# Altium PCB PCB1.pcbdoc
Units mil, origin at the board's own origin, x right, y up, seen from the top; angles counter-clockwise.
Board outline 3330.35 x 2468.5 mil, 2 copper layers (Top Layer, Bottom Layer); 66 components, 77 nets, 279 pads, 115 vias.
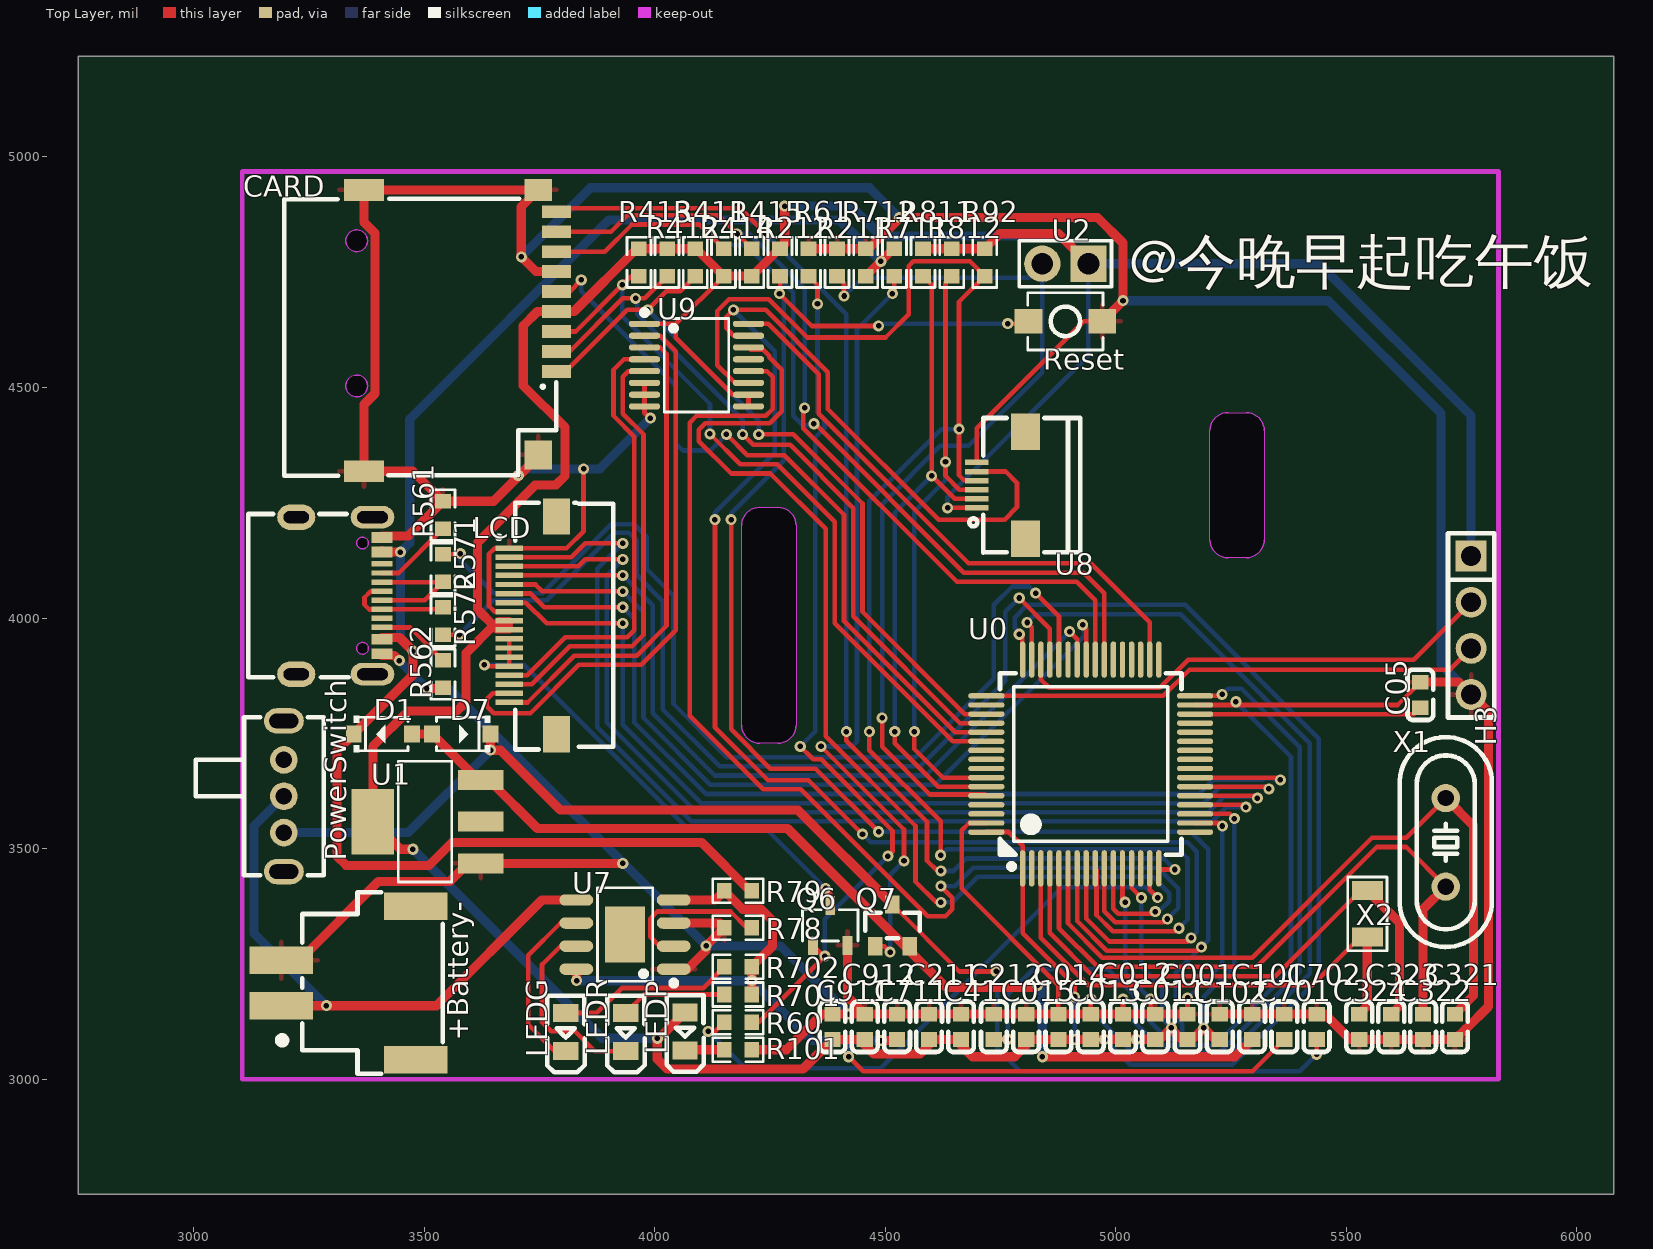
[diagram p0: Top Layer view]
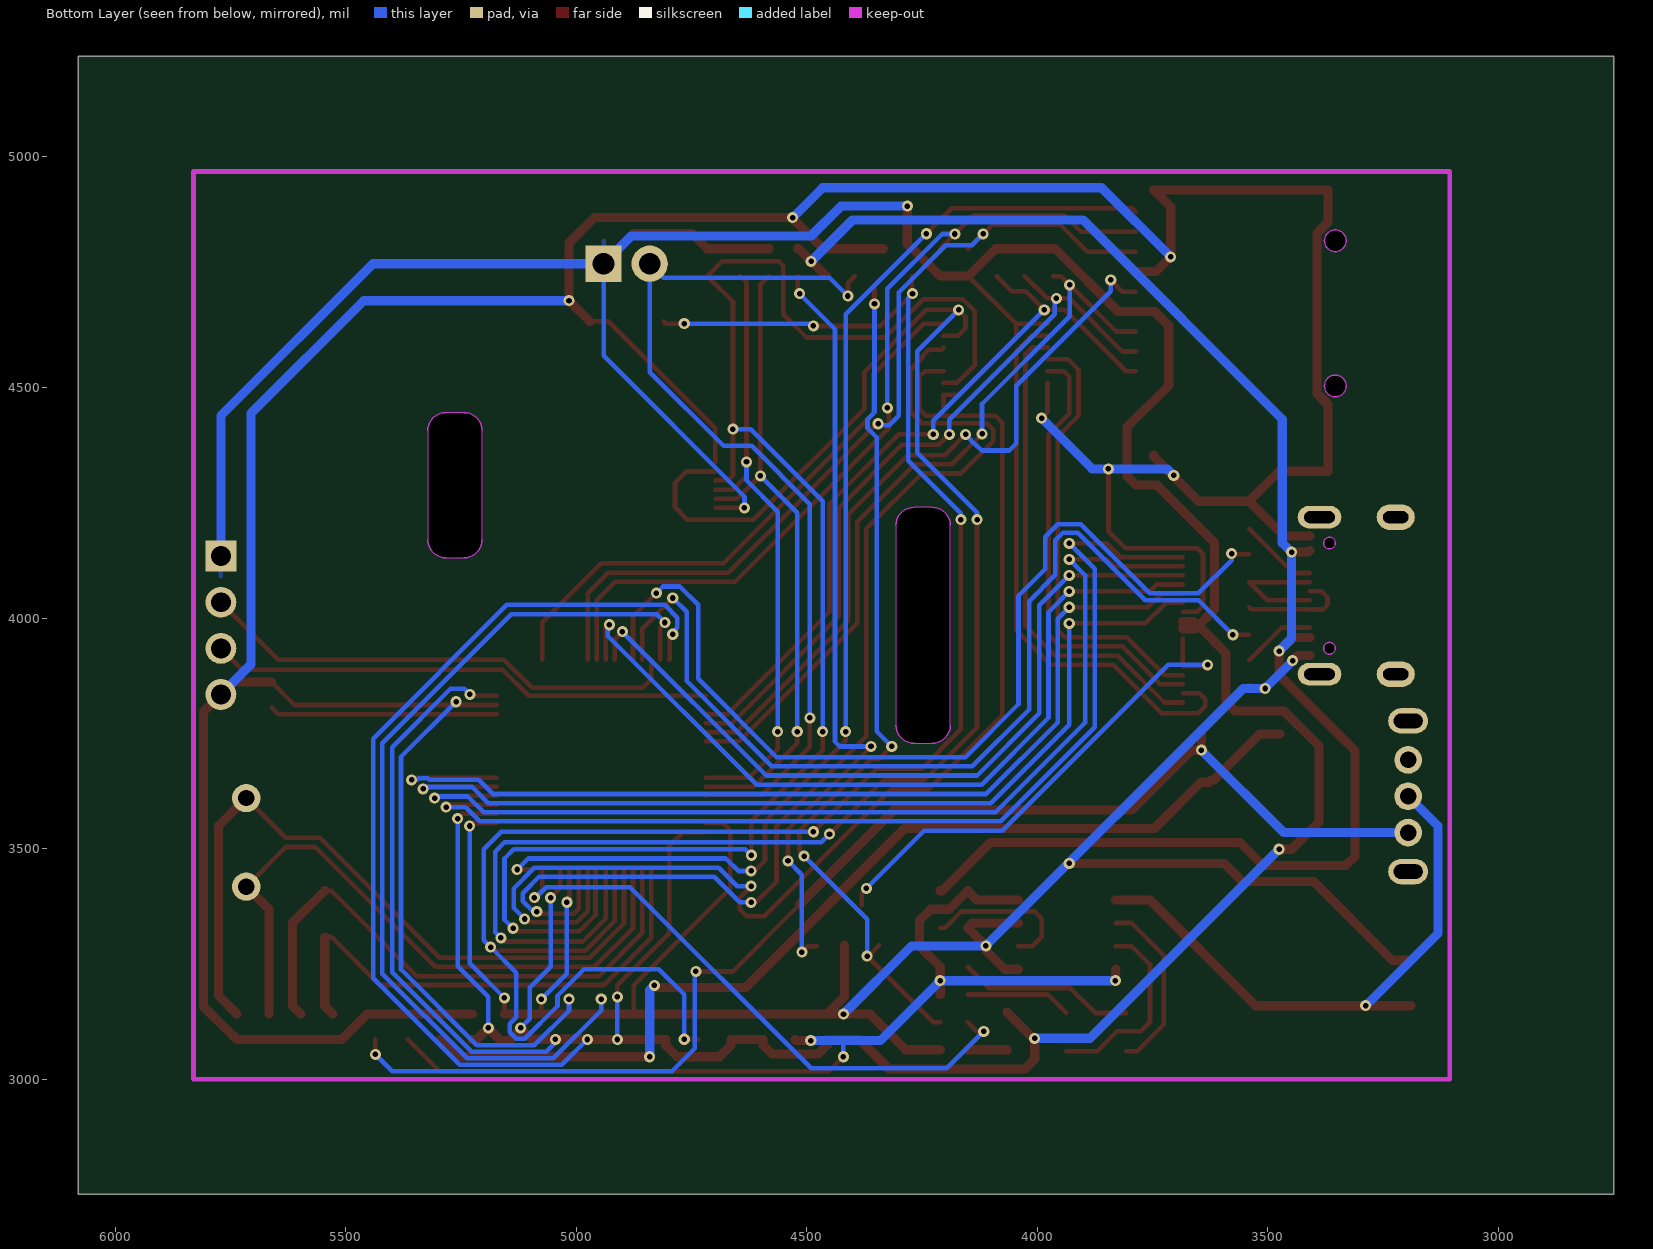
[diagram p1: Bottom Layer view, seen from below]

## Layer stack, top to bottom
Top Layer: signal copper (thickness not stored)
Dielectric: dielectric 12.6, FR-4, Dk 4.8
Bottom Layer: signal copper (thickness not stored)

## Board outline
6080.35,2750 2750,2750 2750,5218.5 6080.35,5218.5
cut-out: 4227.99,4240.16 4267.36,4240.16 cw(c4267.36,4200.79) 4306.73,4200.79 4306.73,3767.72 cw(c4267.36,3767.72) 4267.36,3728.35 4227.99,3728.35 cw(c4227.99,3767.72) 4188.62,3767.72 4188.62,4200.79 cw(c4227.99,4200.79)
cut-out: 5243.74,4445.67 5283.11,4445.67 cw(c5283.11,4406.3) 5322.48,4406.3 5322.48,4170.08 cw(c5283.11,4170.08) 5283.11,4130.71 5243.74,4130.71 cw(c5243.74,4170.08) 5204.37,4170.08 5204.37,4406.3 cw(c5243.74,4406.3)

## Design rules (kind name [scope] priority, off if disabled: settings)
BoardOutlineClearance copperThickness1oz [All] p0: genericclearance=10 ignorepadtopadclearanceinfootprint=FALSE except(0: Arc-SplitContinuation Track-SplitContinuation SMDPad-SplitContinuation THPad-SplitContinuation Via-SplitContinuation Fill-SplitContinuation Poly-SplitContinuation Region-SplitContinuation Text-SplitContinuation; 6: Track-CutoutEdge SMDPad-CutoutEdge THPad-CutoutEdge Via-CutoutEdge Region-CutoutEdge; 11.8: Track-OutlineEdge SMDPad-OutlineEdge THPad-OutlineEdge Via-OutlineEdge Fill-OutlineEdge Region-OutlineEdge Poly-OutlineEdge Text-OutlineEdge Fill-CutoutEdge)
BoardOutlineClearance copperThickness2oz [All] p0: genericclearance=10 ignorepadtopadclearanceinfootprint=FALSE except(0: Arc-SplitContinuation Track-SplitContinuation SMDPad-SplitContinuation THPad-SplitContinuation Via-SplitContinuation Fill-SplitContinuation Poly-SplitContinuation Region-SplitContinuation Text-SplitContinuation; 6: Track-CutoutEdge SMDPad-CutoutEdge THPad-CutoutEdge Via-CutoutEdge Region-CutoutEdge; 11.8: Track-OutlineEdge SMDPad-OutlineEdge THPad-OutlineEdge Via-OutlineEdge Fill-OutlineEdge Region-OutlineEdge Poly-OutlineEdge Text-OutlineEdge Fill-CutoutEdge)
Clearance copperThickness1oz [(InNet('GND') OR InNet('VBAT') OR InNet('$1N3572') OR InNet('$1N3568') OR InNet('VCC3V3') OR InNet('VOUT') OR InNet('SWCLK') OR InNet('SWIO') OR InNet('VBUS') OR InNet('$1N3577') OR InNet('$1N3580') OR InNet('$1N3578') OR InNet('$1N3579') OR InNet('$1N3566') OR InNet('$1N3569') OR InNet('BOOT0') OR InNet('OSCIN') OR InNet('OSCOUT') OR InNet('RESET') OR InNet('YU/Y-') OR InNet('XL/X-') OR InNet('K') OR InNet('XR/X+') OR InNet('YD/Y+') OR InNet('LED') OR InNet('$1N8049') OR InNet('$1N21734') OR InNet('OSC32IN') OR InNet('OSC32OUT') OR InNet('SDIO_D1') OR InNet('SDIO_D0') OR InNet('SDIO_CLK') OR InNet('SDIO_CMD') OR InNet('SDIO_D3') OR InNet('SDIO_D2') OR InNet('TF_CD') OR InNet('TP_IRQ') OR InNet('SPI2_MOSI') OR InNet('SPI2_SCK') OR InNet('SPI1_MISO') OR InNet('SPI1_MOSI') OR InNet('SPI1_CS') OR InNet('SPI1_DC') OR InNet('SPI1_SCK') OR InNet('SPI1_RESET') OR InNet('TP_CS') OR InNet('$1N32516') OR InNet('USB_OTG_FS_DM') OR InNet('USB_OTG_FS_DP') OR InNet('$1N32510') OR InNet('$1N30328') OR InNet('$1N30333') OR InNet('$1N30321') OR InNet('$1N30324') OR InNet('$1N30323') OR InNet('$1N30263') OR InNet('USB_OTG_FS_ID') OR InNet('$1N30287') OR InNet('$1N30381') OR InNet('$1N30347') OR InNet('$1N30352') OR InNet('$1N30355') OR InNet('$1N30360') OR InNet('$1N30357') OR InNet('$1N30378') OR InNet('$1N30326') OR InNet('$1N30300') OR InNet('$1N30298') OR InNet('$1N30240') OR InNet('$1N28494') OR InNet('SPI2_MISO') OR InNet('$1N30291') OR InNet('C_TP_SDA') OR InNet('C_TP_SCK') OR InNet('$1N35567') OR InNet('$1N32508') OR InNet('$1N30354'))] p1: gap=7 ignorepadtopadclearanceinfootprint=FALSE except(4: Track-Track; 6: Track-SMDPad SMDPad-SMDPad Track-THPad SMDPad-THPad THPad-THPad Track-Via SMDPad-Via THPad-Via Via-Via SMDPad-Fill THPad-Fill Via-Fill Fill-Fill Track-Region SMDPad-Region THPad-Region Via-Region Region-Region Track-Poly SMDPad-Poly THPad-Poly Via-Poly Fill-Poly Region-Poly Poly-Poly Track-Text SMDPad-Text THPad-Text Via-Text Fill-Text Region-Text Poly-Text Text-Text; 6.9: Track-Hole SMDPad-Hole THPad-Hole Via-Hole Fill-Hole Region-Hole Poly-Hole Text-Hole Sheet-Hole; 11.8: Track-Fill Fill-Region Track-Sheet SMDPad-Sheet THPad-Sheet Via-Sheet Fill-Sheet Region-Sheet Poly-Sheet Text-Sheet)
Clearance copperThickness2oz [All] p1: gap=7 ignorepadtopadclearanceinfootprint=FALSE except(6: Track-SMDPad SMDPad-SMDPad Track-THPad SMDPad-THPad THPad-THPad Track-Via SMDPad-Via THPad-Via Via-Via SMDPad-Fill THPad-Fill Via-Fill Fill-Fill Track-Region SMDPad-Region THPad-Region Via-Region Region-Region Track-Poly SMDPad-Poly THPad-Poly Via-Poly Fill-Poly Region-Poly Poly-Poly Track-Text SMDPad-Text THPad-Text Via-Text Fill-Text Region-Text Poly-Text Text-Text; 6.9: Track-Hole SMDPad-Hole THPad-Hole Via-Hole Fill-Hole Region-Hole Poly-Hole Text-Hole Sheet-Hole; 8: Track-Track; 11.8: Track-Fill Fill-Region Track-Sheet SMDPad-Sheet THPad-Sheet Via-Sheet Fill-Sheet Region-Sheet Poly-Sheet Text-Sheet)
DiffPairsRouting differentialPair [All] p1: maxuncoupledlength=10 minlimit=6 maxlimit=6 mostfreqgap=6 toplayer_minwidth=5 toplayer_prefwidth=10 toplayer_maxwidth=100 bottomlayer_minwidth=5 bottomlayer_prefwidth=10 bottomlayer_maxwidth=100
PasteMaskExpansion pasteMaskExpansion [All] p1: expansion=0
PlaneConnect innerPlane [All] p1: planeconnectstyle=Relief reliefexpansion=20 reliefentries=4 reliefconductorwidth=10 reliefairgap=10
PolygonConnect copperRegion [All] p1: connectstyle=Relief reliefentries=4 reliefconductorwidth=10 polygonreliefangle="90 Angle" airgapwidth=10
RoutingVias viaSize [All] p1: viastyle="Through Hole" holewidth=12.0078 minholewidth=11.811 maxholewidth=248.0314 width=24.0158 minwidth=19.685 maxwidth=393.7008
SolderMaskExpansion solderMaskExpansion [All] p1: useseparateexpansions=TRUE expansion=2 expansionbottom=2
Width copperThickness1oz [All] p1: maxlimit=100 minlimit=5 preferedwidth=10
Width copperThickness2oz [All] p1: maxlimit=100 minlimit=8 preferedwidth=10

## Components (designator, comment, footprint, x,y, rotation, side; value= is the part's Value field where it differs from the comment)
+Battery- "ZX-XH2.54-2PWT" CONN-SMD_2P-P2.54_MEGASTAR_ZX-XH2.54-2PWT 3335.95,3208.5 r90 top
@今晚早起吃午饭 "TYPE-C-12P" USB-SMD_TYPE-C16PIN 3315.95,4048.5 r270 top
C001 "CGA0603X5R106K100JT" C0603 5155.94,3113.5 r90 top
C05 "CL10A225KO8NNNC" C0603 5660.94,3833.5 r270 top
C011 "CGA0603X7R104K500JT" C0603 5085.94,3113.5 r90 top
C012 "CGA0603X7R104K500JT" C0603 5015.94,3113.5 r90 top
C013 "CGA0603X7R104K500JT" C0603 4945.94,3113.5 r270 top
C014 "CGA0603X7R104K500JT" C0603 4875.94,3113.5 r90 top
C015 "CGA0603X7R104K500JT" C0603 4805.94,3113.5 r90 top
C41 "CGA0603X7R104K500JT" C0603 4664.7,3113.5 r90 top
C101 "CGA0603X5R106K100JT" C0603 5295.95,3113.5 r90 top
C102 "CGA0603X5R106K100JT" C0603 5225.94,3113.51 r270 top
C211 "CGA0603X7R104K500JT" C0603 4595.32,3113.5 r90 top
C212 "CGA0603X7R104K500JT" C0603 4735.94,3113.5 r90 top
C321 "CC0603JRNPO9BN200" C0603 5735.94,3113.5 r90 top
C322 "CC0603JRNPO9BN200" C0603 5666.8,3113.5 r90 top
C323 "CC0603JRNPO9BN200" C0603 5597.65,3113.5 r90 top
C324 "CC0603JRNPO9BN200" C0603 5528.51,3113.5 r90 top
C701 "CGA0603X5R106K100JT" C0603 5365.94,3113.51 r270 top
C702 "CGA0603X5R106K100JT" C0603 5435.94,3113.51 r270 top
C711 "CGA0603X7R104K500JT" C0603 4525.94,3113.51 r270 top
C911 "CGA0603X7R104K500JT" C0603 4385.94,3113.51 r270 top
C912 "CGA0603X7R104K500JT" C0603 4455.94,3113.51 r270 top
CARD "TF PUSH" TF-SMD_TF-PUSH 3578.39,4623.5 r270 top
D1 "1N5819W_C5451628" SOD-123_L2.7-W1.6-LS3.7-FD 3410.95,3748.5 r180 top
D7 "1N5819W_C5451628" SOD-123_L2.7-W1.6-LS3.7-FD 3580.95,3748.5 r0 top
H3 "PZ254V-11-04P_C492403" HDR-TH_4P-P2.54-V-M 5770.94,3984.25 r270 top
LCD "FPC-05-18P" FPC-SMD_18P-P0.50_XW05200-18 3735.87,3984.25 r90 top
LEDG "KT-0805G" LED0805-R-RD 3807.3,3102.15 r90 top
LEDP "KT-0805G" LED0805-R-RD 4065.95,3103.5 r90 top
LEDR "KT-0805G" LED0805-R-RD 3937.3,3102.15 r90 top
PowerSwitch "SK12D07VG4" SW-TH_SK12D07VG4 3195.95,3613.5 r270 top
Q6 "S8050 J3Y(RANGE:200-350)" SOT-23-3_L3.0-W1.7-P0.95-LS2.9-BR 4380.94,3333.5 r270 top
Q7 "AO3401A_C347476" SOT-23_L2.9-W1.3-P1.90-LS2.4-BR 4515.94,3333.5 r270 top
R60 "FRC0603F1001TS" R0603 4180.94,3123.5 r180 top
R61 "RCA0310KJLF" R0603 4334.01,4771.34 r90 top
R78 "FRC0603J122 TS" R0603 4180.94,3328.5 r180 top
R79 "FRL0603JR400TS" R0603 4180.94,3408.5 r0 top
R92 "RCA03100KJLF" R0603 4715.94,4771.34 r90 top
R101 "FRC0603F1001TS" R0603 4180.94,3063.5 r0 top
R211 "RCA0310KJLF" R0603 4395.83,4771.34 r90 top
R212 "RCA0310KJLF" R0603 4272.2,4771.34 r270 top
R411 "RCA0310KJLF" R0603 4088.45,4771.34 r90 top
R412 "RCA0310KJLF" R0603 4027.2,4771.34 r90 top
R413 "RCA0310KJLF" R0603 3965.95,4771.34 r90 top
R414 "RCA0310KJLF" R0603 4149.7,4771.34 r270 top
R415 "RCA0310KJLF" R0603 4210.95,4771.34 r270 top
R561 "0603WAF5101T5E" R0603 3540.95,4223.5 r270 top
R562 "0603WAF5101T5E" R0603 3540.95,3878.5 r270 top
R571 "0603WAF220JT5E" R0603 3540.95,4108.5 r90 top
R572 "0603WAF220JT5E" R0603 3540.95,3993.5 r270 top
R701 "FRC0603F1001TS" R0603 4180.94,3183.5 r0 top
R702 "FRC0603F1001TS" R0603 4180.94,3243.5 r0 top
R711 "RCA0310KJLF" R0603 4520.15,4771.34 r270 top
R712 "RCA0310KJLF" R0603 4457.99,4771.34 r270 top
R811 "RCA0310KJLF" R0603 4582.31,4771.34 r90 top
R812 "RCA0310KJLF" R0603 4644.47,4771.34 r90 top
Reset "KEY-3*4*2" SW-SMD_L4.0-W2.9-LS5.0 4890.94,4643.5 r0 top
U0 "STM32F401RCT6" LQFP-64_L10.0-W10.0-P0.50-LS12.0-BL 4945.94,3683.5 r0 top
U1 "AMS1117-3.3V_C5205141" SOT-223-3_L6.5-W3.4-P2.30-LS7.0-BR 3505.95,3558.5 r0 top
U2 "HEAD2" HDR-TH_2P-P2.54-V-M 4890.94,4768.5 r180 top
U7 "TP4056_C21713961" ESOP-8_L4.9-W3.9-P1.27-LS6.0-BL-EP3.1 3935.95,3313.5 r90 top
U8 "AFC01-S06FCA-00" FPC-SMD_P0.50-6P_AFC01-S06FCA-00 4751.61,4288.19 r90 top
U9 "XPT2046" TSSOP-16_L5.0-W4.4-P0.65-LS6.4-BL 4090.95,4548.5 r270 top
X1 "8MHZ" HC-49S_L11.5-W5.0-P4.88 5715.94,3513.5 r270 top
X2 "32.768KHZ" CRYSTAL-SMD_L3.2-W1.5-1 5545.94,3358.5 r270 top

## Footprints (in the part's own frame and the unit in brackets; to place one, negate y for a bottom-side part, rotate by r counter-clockwise, add the part's x,y. Pads: shape width x height; smd on the part's side, far side on the other; paste and mask are expansions set on the pad)
C0603 [mm]
  rect 0.8x0.9 smd: 1(-0.7,0) 2(0.7,0)
  silkscreen extent -1.39,-0.71 1.39,0.71
CONN-SMD_2P-P2.54_MEGASTAR_ZX-XH2.54-2PWT [mm]
  rect 1.5x3.5 smd: 1(-1.25,3.7) 2(1.25,3.7) 3(-4.23,-3.7) 4(4.23,-3.7)
  silkscreen extent -5,-5.21 5,3.85
CRYSTAL-SMD_L3.2-W1.5-1 [mm]
  rect 1.05x1.7 smd: 1(-1.275,0) 2(1.275,0)
  silkscreen extent -2.03,-1.08 2.03,1.08
ESOP-8_L4.9-W3.9-P1.27-LS6.0-BL-EP3.1 [mm]
  oval 0.63x1.865 smd: 1(-1.905,-2.682) 2(-0.635,-2.682) 3(0.635,-2.682) 4(1.905,-2.682) 5(1.905,2.682) 6(0.635,2.682) 7(-0.635,2.682) 8(-1.905,2.682)
  rect 3.1x2.2 smd: 9(0,0)
  silkscreen extent -2.82,-2.83 2.58,1.52
FPC-SMD_18P-P0.50_XW05200-18 [mm]
  rect 0.3x1.5 smd: 1(4.25,1.3) 2(3.75,1.3) 3(3.25,1.3) 4(2.75,1.3) 5(2.25,1.3) 6(1.75,1.3) 7(1.25,1.3) 8(0.75,1.3) 9(0.25,1.3) 10(-0.25,1.3) 11(-0.75,1.3) 12(-1.25,1.3) 13(-1.75,1.3) 14(-2.25,1.3) 15(-2.75,1.3) 16(-3.25,1.3) 17(-3.75,1.3) 18(-4.25,1.3)
  rect 2x1.5 smd: 19(-6,-1.3) 20(6,-1.3)
  silkscreen extent -6.84,-4.44 6.76,1.96
FPC-SMD_P0.50-6P_AFC01-S06FCA-00 [mm]
  rect 0.3x1.3 smd: 1(-1.248,1.339) 2(-0.748,1.339) 3(-0.248,1.339) 4(0.252,1.339) 5(0.752,1.339) 6(1.252,1.339)
  rect 2x1.6 smd: 7(-2.95,-1.339) 8(2.95,-1.339)
  silkscreen extent -3.72,-4.36 3.7,1.75
HC-49S_L11.5-W5.0-P4.88 [mm]
  round 1.56 hole 0.9: 1(-2.44,0) 2(2.44,0)
  silkscreen extent -5.8,-2.54 5.77,2.54
HDR-TH_2P-P2.54-V-M [mm]
  rect 2x2 hole 1.2: 1(-1.27,0)
  round 2 hole 1.2: 2(1.27,0)
  silkscreen extent -2.54,-1.27 2.54,1.27
HDR-TH_4P-P2.54-V-M [mm]
  rect 1.7x1.7 hole 1.1: 1(-3.81,0)
  round 1.7 hole 1.1: 2(-1.27,0) 3(1.27,0) 4(3.81,0)
  silkscreen extent -5.08,-1.27 5.08,1.27
LED0805-R-RD [mm]
  rect 1x1.4 smd: 1(1.05,0) 2(-1.05,0)
  silkscreen extent -2.22,-1.04 1.99,1.01
LQFP-64_L10.0-W10.0-P0.50-LS12.0-BL [mm]
  oval 0.3x2 smd: 1(-3.75,-5.75) 2(-3.25,-5.75) 3(-2.75,-5.75) 4(-2.25,-5.75) 5(-1.75,-5.75) 6(-1.25,-5.75) 7(-0.75,-5.75) 8(-0.25,-5.75) 9(0.25,-5.75) 10(0.75,-5.75) 11(1.25,-5.75) 12(1.75,-5.75) 13(2.25,-5.75) 14(2.75,-5.75) 15(3.25,-5.75) 16(3.75,-5.75) 33(3.75,5.75) 34(3.25,5.75) 35(2.75,5.75) 36(2.25,5.75) 37(1.75,5.75) 38(1.25,5.75) 39(0.75,5.75) 40(0.25,5.75) 41(-0.25,5.75) 42(-0.75,5.75) 43(-1.25,5.75) 44(-1.75,5.75) 45(-2.25,5.75) 46(-2.75,5.75) 47(-3.25,5.75) 48(-3.75,5.75)
  oval 2x0.3 smd: 17(5.75,-3.75) 18(5.75,-3.25) 19(5.75,-2.75) 20(5.75,-2.25) 21(5.75,-1.75) 22(5.75,-1.25) 23(5.75,-0.75) 24(5.75,-0.25) 25(5.75,0.25) 26(5.75,0.75) 27(5.75,1.25) 28(5.75,1.75) 29(5.75,2.25) 30(5.75,2.75) 31(5.75,3.25) 32(5.75,3.75) 49(-5.75,3.75) 50(-5.75,3.25) 51(-5.75,2.75) 52(-5.75,2.25) 53(-5.75,1.75) 54(-5.75,1.25) 55(-5.75,0.75) 56(-5.75,0.25) 57(-5.75,-0.25) 58(-5.75,-0.75) 59(-5.75,-1.25) 60(-5.75,-1.75) 61(-5.75,-2.25) 62(-5.75,-2.75) 63(-5.75,-3.25) 64(-5.75,-3.75)
  silkscreen extent -5,-5.79 5,5
R0603 [mil]
  rect 31.75x34.02 smd: 1(-29.66,0) 2(29.66,0)
  silkscreen extent -55,-26 55,26
SOD-123_L2.7-W1.6-LS3.7-FD [mm]
  rect 0.88x0.96 smd: 1(-1.61,0) 2(1.61,0)
  silkscreen extent -1.38,-1 1.6,1
SOT-23-3_L3.0-W1.7-P0.95-LS2.9-BR [mil]
  rect 40.85x20.95 smd: 1(43.36,-37.4) 2(43.36,37.4) 3(-43.36,0)
  silkscreen extent -34,-60 34,60
SOT-23_L2.9-W1.3-P1.90-LS2.4-BR [mm]
  rect 1x0.8 smd: 1(1.15,-0.95) 2(1.15,0.95) 3(-1.15,0)
  silkscreen extent -0.7,-1.5 0.7,1.5
SOT-223-3_L6.5-W3.4-P2.30-LS7.0-BR [mm]
  rect 2.5x1.1 smd: 1(2.97,-2.3) 2(2.97,0) 3(2.97,2.3)
  rect 2.34x3.6 smd: 4(-2.97,0)
  silkscreen extent -1.57,-3.33 1.37,3.33
SW-SMD_L4.0-W2.9-LS5.0 [mm]
  rect 1.53x1.36 smd: 1(-2.035,0) 2(2.035,0)
  silkscreen extent -2.08,-1.58 2.08,1.58
SW-TH_SK12D07VG4 [mil]
  round 60 hole 36: 1(-78.74,0) 2(0,0) 3(78.74,0)
  oval 55.12x86.61 hole 31.5 slot 62.99 at 90 deg: 4(163.38,0) 5(-163.39,0)
  silkscreen extent -171,-191 171,87
TF-SMD_TF-PUSH [mm]
  rect 0.7x1.6 smd: 1(2.25,5.3) 2(1.15,5.3) 3(0.05,5.3) 4(-1.05,5.3) 5(-2.15,5.3) 6(-3.25,5.3) 7(-4.35,5.3) 8(-5.45,5.3) CD(-6.55,5.3)
  rect 1.2x1.5 smd: 10(-7.75,4.3)
  rect 1.2x2.2 smd: 11(-7.75,-5.3) 12(7.75,-5.3)
  rect 1.6x1.5 smd: 13(6.85,4.3)
  Board Outline Layer circle w0.005: c-4.95,-5.7 r0.6
  Board Outline Layer circle w0.005: c3.05,-5.7 r0.6
  Board Outline Layer region: -4.95,-5.1 -4.69,-5.159 -4.481,-5.326 -4.365,-5.567 -4.365,-5.834 -4.481,-6.074 -4.69,-6.241 -4.95,-6.3 -4.95,-6.3 -5.21,-6.241 -5.419,-6.074 -5.535,-5.834 -5.535,-5.567 -5.419,-5.326 -5.21,-5.159 -4.95,-5.1
  Board Outline Layer region: 3.05,-5.1 3.31,-5.159 3.519,-5.326 3.635,-5.567 3.635,-5.834 3.519,-6.074 3.31,-6.241 3.05,-6.3 3.05,-6.3 2.79,-6.241 2.581,-6.074 2.465,-5.834 2.465,-5.567 2.581,-5.326 2.79,-5.159 3.05,-5.1
  Multi-Layer board cut-out: -4.95,-5.1 -4.69,-5.159 -4.481,-5.326 -4.365,-5.567 -4.365,-5.834 -4.481,-6.074 -4.69,-6.241 -4.95,-6.3 -4.95,-6.3 -5.21,-6.241 -5.419,-6.074 -5.535,-5.834 -5.535,-5.567 -5.419,-5.326 -5.21,-5.159 -4.95,-5.1
  Multi-Layer board cut-out: 3.05,-5.1 3.31,-5.159 3.519,-5.326 3.635,-5.567 3.635,-5.834 3.519,-6.074 3.31,-6.241 3.05,-6.3 3.05,-6.3 2.79,-6.241 2.581,-6.074 2.465,-5.834 2.465,-5.567 2.581,-5.326 2.79,-5.159 3.05,-5.1
  silkscreen extent -7.26,-9.7 8,5.3
TSSOP-16_L5.0-W4.4-P0.65-LS6.4-BL [mil]
  oval 13.5x68.17 smd: 1(-89.57,-112.83) 2(-63.98,-112.83) 3(-38.39,-112.83) 4(-12.79,-112.83) 5(12.8,-112.83) 6(38.39,-112.83) 7(63.98,-112.83) 8(89.57,-112.83) 9(89.57,112.83) 10(63.98,112.83) 11(38.39,112.83) 12(12.8,112.83) 13(-12.79,112.83) 14(-38.39,112.83) 15(-63.98,112.83) 16(-89.57,112.83)
  silkscreen extent -120,-119 101,70
USB-SMD_TYPE-C16PIN [mm]
  oval 1.25x2.4 hole 0.65 slot 1.7 at 90 deg: 17(-4.325,1.835) 18(4.325,1.835)
  oval 1.4x2.1 hole 0.65 slot 1.4 at 90 deg: 19(-4.325,-2.365) 20(4.325,-2.365)
  rect 0.3x1.15 smd: A1(-3.35,2.365) A4(-2.55,2.365) A5(-1.25,2.365) A6(-0.25,2.365) A7(0.25,2.365) A8(1.25,2.365) A9(2.55,2.365) A12(3.35,2.365) B1(3.05,2.365) B4(2.25,2.365) B5(1.75,2.365) B6(0.75,2.365) B7(-0.75,2.365) B8(-1.75,2.365) B9(-2.25,2.365) B12(-3.05,2.365)
  Board Outline Layer circle w0.005: c-2.9,1.285 r0.325
  Board Outline Layer circle w0.005: c2.9,1.285 r0.325
  Board Outline Layer region: -2.9,1.61 -2.759,1.578 -2.646,1.488 -2.583,1.358 -2.583,1.213 -2.646,1.083 -2.759,0.992 -2.9,0.96 -2.9,0.96 -3.041,0.992 -3.154,1.083 -3.217,1.213 -3.217,1.358 -3.154,1.488 -3.041,1.578 -2.9,1.61
  Board Outline Layer region: 2.9,1.61 3.041,1.578 3.154,1.488 3.217,1.358 3.217,1.213 3.154,1.083 3.041,0.992 2.9,0.96 2.9,0.96 2.759,0.992 2.646,1.083 2.583,1.213 2.583,1.358 2.646,1.488 2.759,1.578 2.9,1.61
  Multi-Layer board cut-out: -2.9,1.61 -2.759,1.578 -2.646,1.488 -2.583,1.358 -2.583,1.213 -2.646,1.083 -2.759,0.992 -2.9,0.96 -2.9,0.96 -3.041,0.992 -3.154,1.083 -3.217,1.213 -3.217,1.358 -3.154,1.488 -3.041,1.578 -2.9,1.61
  Multi-Layer board cut-out: 2.9,1.61 3.041,1.578 3.154,1.488 3.217,1.358 3.217,1.213 3.154,1.083 3.041,0.992 2.9,0.96 2.9,0.96 2.759,0.992 2.646,1.083 2.583,1.213 2.583,1.358 2.646,1.488 2.759,1.578 2.9,1.61
  silkscreen extent -4.5,-5.01 4.5,0.52

## Via types
v1: diameter 24.02, hole 12.01, Top Layer to Bottom Layer, 115 vias

## Nets (pads, with @x,y where several pads share a name; then routed paths per layer and width w, separated by ;. In a path a pad name is that pad's centre, name@x,y a point inside that pad or via, vN(x,y) a via of type N, cw(c..) or ccw(c..) an arc to the next point about the centre after c; other vN are vias at no path point)
$1N3566: Q7.1 R711.2 | length 1696.6
  Top Layer w10: v1(4360.94,3721.5) 4540.94,3541.5 v1(4540.94,3473.5) ; Q7.1 4497.95,3288.23 v1(4510.77,3275.41) ; v1(4515.94,4703.5) 4520.15,4707.71 R711.2
  Bottom Layer w10: v1(4360.94,3721.5) 4428.94,3721.5 4438.94,3731.5 4438.94,4626.5 v1(4515.94,4703.5) ; v1(4510.77,3275.41) 4510.77,3443.32 v1(4540.94,3473.5)
$1N3568: C702.2 D7.2 PowerSwitch.3 Q7.3 | length 2781.9
  Top Layer w10: Q7.3 4661.22,3233.5 v1(4740.94,3233.5) ; v1(5435.94,3053.5) C702.2
  Top Layer w20: D7.2 v1(3644.34,3713.5) 3665.95,3713.5 3795.95,3583.5 4311.22,3583.5 Q7.3
  Bottom Layer w10: v1(4740.94,3233.5) 4742.95,3231.5 4742.95,3066.5 4792.64,3016.81 5399.25,3016.81 v1(5435.94,3053.5)
  Bottom Layer w20: PowerSwitch.3 3465.59,3534.76 v1(3644.34,3713.5)
$1N3569: R78.1 U7.2 | length 339.9
  Top Layer w10: U7.2 4010.95,3288.5 3990.24,3309.21 3990.24,3347.8 4005.95,3363.5 4164.7,3363.5 4199.7,3328.5 R78.1
$1N3572: C701.2 C711.2 R79.1 R701.2 R702.2 U7.4 U7.8 | length 2225.4
  Top Layer w10: v1(4420.94,3048.5) 4452.64,3016.81 5296.81,3016.81 C701.2
  Top Layer w20: U7.8 3830.95,3237.89 v1(3830.95,3213.5) ; U7.4 4131.28,3388.5 R79.1 4191.28,3368.5 4230.94,3368.5 4255.94,3343.5 4255.94,3288.84 R702.2 R701.2 ; v1(4491.65,3083.5) 4523.5,3083.5 C711.2
  Bottom Layer w10: v1(4420.94,3048.5) 4420.94,3083.13 4421.32,3083.5
  Bottom Layer w20: v1(3830.95,3213.5) v1(4210.94,3213.5) 4340.94,3083.5 4421.32,3083.5 v1(4491.65,3083.5)
$1N3577: LEDR.2 U7.7 | length 423.3
  Top Layer w10: U7.7 3795.95,3288.5 3755.95,3248.5 3755.95,3123.5 3775.95,3103.5 3827.36,3103.5 3870.06,3060.8 LEDR.2
$1N3578: LEDG.2 U7.6 | length 388.6
  Top Layer w10: LEDG.2 3783.64,3060.8 3725.95,3118.5 3725.95,3268.5 3795.95,3338.5 U7.6
$1N3579: LEDG.1 R702.1 | length 385.4
  Top Layer w10: LEDG.1 3874.53,3143.5 3928.54,3197.52 4105.3,3197.52 R702.1
$1N3580: LEDR.1 R701.1 | length 230.6
  Top Layer w10: LEDR.1 3977.3,3183.5 R701.1
$1N8049: Q6.1 R60.1 R61.1 | length 1918.3
  Top Layer w10: R60.1 4225.94,3123.5 v1(4369.33,3266.89) 4366.8,3266.89 Q6.1 ; v1(4315.94,3721.5) 4343.94,3693.5 4361.45,3693.5 4515.94,3539.01 4515.94,3493.5 v1(4505.94,3483.5) ; R61.1 4353.36,4722.34 v1(4353.36,4681.5)
  Bottom Layer w10: v1(4315.94,3721.5) 4348.36,3753.91 4348.36,4391.67 4368.55,4411.86 4368.55,4430.9 4353.36,4446.09 v1(4353.36,4681.5) ; v1(4369.33,3266.89) 4369.33,3346.89 v1(4505.94,3483.5)
$1N21734: LEDP.2 R101.1 | length 85.9
  Top Layer w20: LEDP.2 4067.3,3063.5 R101.1
$1N28494: U0.14
$1N30240: U0.17
$1N30263: U0.50
$1N30287: U0.38
$1N30291: U0.2
$1N30298: U0.24
$1N30300: U0.25
$1N30321: U0.57
$1N30323: U0.55
$1N30324: U0.56
$1N30326: U0.26
$1N30328: U0.62
$1N30333: U0.61
$1N30347: U0.36
$1N30352: U0.35
$1N30354: U0.29
$1N30355: U0.33
$1N30357: U0.28
$1N30360: C05.2 U0.30 | length 494.5
  Top Layer w10: U0.30 5646.77,3791.77 C05.2
$1N30378: U0.27
$1N30381: U0.37
$1N32508: @今晚早起吃午饭.A6 @今晚早起吃午饭.B6 R572.1 | length 236
  Top Layer w10: 3409.07,4058.34 3384.67,4058.34 3370.95,4044.62 3370.95,4028.5 3380.95,4018.5 3408.59,4018.5 3409.07,4018.97 3536.76,4018.97 R572.1
$1N32510: @今晚早起吃午饭.B5 R562.1 | length 161.5
  Top Layer w10: 3409.07,3979.6 3469.51,3979.6 R562.1
$1N32516: @今晚早起吃午饭.A5 R561.2 | length 171.7
  Top Layer w10: 3409.07,4097.71 3444.82,4097.71 R561.2
$1N35567: @今晚早起吃午饭.A7 @今晚早起吃午饭.B7 R571.1 | length 279.8
  Top Layer w10: 3409.07,4038.66 3501.11,4038.66 3540.14,4077.69 R571.1@3540.14,4078.03 ; 3409.07,4078.03 R571.1@3540.14,4078.03 ; R571.1 R571.1@3540.14,4078.03
BOOT0: R211.1 U0.60 U2.2 | length 2005.9
  Top Layer w10: R211.1 4410.94,4726.57 v1(4410.94,4698.5) ; v1(4493.44,3783.43) 4493.44,3721.18 4597.22,3617.4 4716.77,3617.4 U0.60
  Bottom Layer w10: v1(4410.94,4698.5) 4450.94,4738.5 4810.94,4738.5 U2.2 4840.94,4533.5 4680.94,4373.5 4619.69,4373.5 4493.44,4247.26 v1(4493.44,3783.43)
C_TP_SCK: R812.1 U0.58 U8.3 | length 1351.6
  Top Layer w10: v1(4563.43,3753.5) 4563.43,3716.02 4625.48,3653.97 U0.58 ; R812.1 4630.94,4728.16 v1(4630.94,4338.63) 4630.94,4308.5 4661.02,4278.43 U8.3
  Bottom Layer w10: v1(4563.43,3753.5) 4563.43,4230.99 4630.94,4298.5 v1(4630.94,4338.63)
C_TP_SDA: R811.1 U0.59 U8.2 | length 1410.2
  Top Layer w10: v1(4520.94,3753.5) 4520.94,3728.5 4615.15,3634.29 U0.59 ; R811.1 4600.94,4723.05 v1(4600.94,4308.5) 4650.7,4258.75 U8.2
  Bottom Layer w10: v1(4520.94,3753.5) 4520.94,4228.5 v1(4600.94,4308.5)
GND: +Battery-.2 @今晚早起吃午饭.A1 @今晚早起吃午饭.A12 @今晚早起吃午饭.B1 @今晚早起吃午饭.B12 C001.2 C05.1 C011.2 C012.2 C013.1 C014.2 C015.2 C41.2 C101.2 C102.1 C211.2 C212.2 C321.1 C322.1 C323.1 C324.1 C701.1 C702.1 C711.1 C911.1 C912.1 CARD.6 CARD.10 CARD.11 CARD.12 CARD.13 H3.4 LCD.1 LCD.8 Q6.2 R61.2 R78.2 R101.2 R211.2 R561.1 R562.2 R712.1 Reset.2 U0.12 U0.18 U0.31 U0.47 U0.63 U1.1 U7.1 U7.3 U8.6 U9.6 U9.7 U9.8 | length 16591.4
  Top Layer w10: LCD.8 3684.41,4013.5 3653.68,4013.5 3640.95,4026.24 3640.95,4139.12 3653.4,4151.57 LCD.1 3809.01,4151.57 3845.95,4188.5 v1(3845.95,4323.5) ; U9.6 U9.7 U9.8 3978.12,4446.33 v1(3990.95,4433.5) ; U8.6 4698.88,4411.44 4930.94,4643.5 Reset.2 ; U0.63 4681.91,3555.55 4665.94,3539.58 4665.94,3413.5 4875.94,3203.5 C014.2 ; v1(4807.84,3990.4) 4817.99,3980.25 U0.47 ; C013.1 v1(4945.94,3173.5) ; U0.12 5014.85,3389.47 v1(5020.76,3383.55) ; C012.2 v1(5015.94,3173.5) ; v1(5075.94,3173.5) 5075.94,3151.06 C011.2 ; C001.2 v1(5155.94,3176.03) ; U0.18 5224.89,3555.55 v1(5231.44,3549) ; U0.31 5611.34,3811.45 C05.1
  Top Layer w20: +Battery-.2 3230.16,3257.72 3400.95,3428.5 3555.95,3428.5 3595.39,3467.95 U1.1 v1(3930.95,3467.95) ; 3409.07,3918.81 3435.01,3918.81 v1(3446.31,3907.52) ; 3409.07,4178.19 3465.97,4178.19 R561.1 ; v1(3505.94,3847.2) 3539.31,3847.2 R562.2 ; CARD.13 3747.68,4350.23 3650.61,4253.16 R561.1 ; CARD.6 3742.99,4751.45 v1(3710.95,4783.5) 3710.95,4891.89 CARD.10 CARD.11 3369.73,4858.65 3393.58,4834.79 3393.58,4487.02 3369.73,4463.16 CARD.12 3475.72,4318.38 R561.1 ; U7.1 4070.95,3238.5 4111.78,3279.34 v1(4111.78,3289) R78.2 4141.28,3338.5 U7.3 ; R101.2 4285.94,3063.5 4363.51,3141.07 C911.1 v1(4420.57,3141.06) C912.1 ; R61.2 R211.2 R712.1 4464.66,4801 4532.16,4868.5 4960.94,4868.5 5015.94,4813.5 v1(5015.94,4688.38) Reset.2 ; Q6.2 4418.35,3178.66 C912.1 ; C001.2 C011.2 C012.2 C013.1 C014.2 C015.2 C212.2 C41.2 C211.2 C711.1 C912.1 ; C102.1 C101.2 C701.1 C702.1 5453.38,3141.07 5508.51,3085.94 C324.1 C323.1 C322.1 C321.1 5759.33,3109.33 5760.28,3109.33 5808.54,3157.59 5808.54,3796.65 H3.4 5744.13,3861.06 C05.1
  Bottom Layer w10: v1(4807.84,3990.4) 4825.94,4008.5 5140.94,4008.5 5420.94,3728.5 5420.94,3228.86 5236.93,3044.84 5049.88,3044.84 4945.94,3148.78 v1(4945.94,3173.5) ; v1(5015.94,3173.5) 5015.94,3148.5 5090.94,3073.5 5215.94,3073.5 5380.31,3237.87 5380.31,3699.14 v1(5260.94,3818.5) ; v1(5020.76,3383.55) 5020.76,3228.68 v1(5075.94,3173.5) ; v1(5155.94,3176.03) 5231.44,3251.52 v1(5231.44,3549)
  Bottom Layer w20: v1(3446.31,3907.52) 3505.94,3847.88 v1(3505.94,3847.2) 3553.57,3847.2 v1(4111.78,3289) 4272.64,3289 v1(4420.57,3141.06) ; v1(3704.37,4309.33) 3718.54,4323.5 v1(3845.95,4323.5) 3880.95,4323.5 v1(3990.95,4433.5) ; v1(3710.95,4783.5) 3860.95,4933.5 4465.94,4933.5 v1(4530.94,4868.5) ; v1(5015.94,4688.38) 5461.06,4688.38 5705.94,4443.5 5705.94,3899.25 H3.4
K: LCD.11 LCD.12 LCD.13 LCD.14 Q6.3 | length 1095.6
  Top Layer w10: v1(3630.95,3898.5) 3633.78,3895.67 LCD.14 LCD.13 LCD.12 LCD.11 ; v1(4370.94,3413.5) 4380.94,3403.5 Q6.3
  Bottom Layer w10: v1(3630.95,3898.5) 3715.95,3898.5 4075.95,3538.5 4245.94,3538.5 v1(4370.94,3413.5)
LED: R60.2 U0.15 | length 1293.7
  Top Layer w10: v1(4116.41,3103.5) 4131.28,3103.5 R60.2 ; U0.15 5073.9,3410.55 v1(5090.94,3393.5)
  Bottom Layer w10: v1(4116.41,3103.5) 4196.41,3023.5 4490.94,3023.5 4883.76,3416.32 5065.29,3416.32 5088.1,3393.5 v1(5090.94,3393.5)
OSC32IN: C324.2 U0.3 X2.2 | length 1118.9
  Top Layer w10: U0.3 4837.68,3306.77 4940.43,3204.02 5426.46,3204.02 5530.75,3308.31 X2.2
  Top Layer w20: C324.2 5545.94,3158.5 X2.2
OSC32OUT: C323.2 U0.4 X2.1 | length 1248.3
  Top Layer w10: U0.4 4857.36,3317.08 4950.94,3223.5 5345.94,3223.5 5531.14,3408.7 X2.1
  Top Layer w20: X2.1 5615.94,3338.69 5615.94,3159.36 C323.2
OSCIN: C322.2 U0.5 X1.2 | length 1443.5
  Top Layer w10: U0.5 4877.05,3327.4 4960.94,3243.5 5305.94,3243.5 5565.94,3503.5 5629.89,3503.5 X1.2
  Top Layer w20: C322.2 5666.8,3368.3 X1.2
OSCOUT: C321.2 U0.6 X1.1 | length 1622.6
  Top Layer w10: U0.6 4896.73,3337.71 4970.94,3263.5 5295.94,3263.5 5555.94,3523.5 5629.89,3523.5 X1.1
  Top Layer w20: X1.1 5775.94,3549.56 5775.94,3181.06 C321.2
RESET: C212.1 R212.2 Reset.1 U0.7 | length 4205.2
  Top Layer w10: v1(4165.94,4213.5) 4165.94,3758.55 4250.99,3673.5 4348.94,3673.5 v1(4485.94,3536.5) ; R212.2 4272.2,4704.75 v1(4270.94,4703.5) 4340.94,4633.5 v1(4485.94,4633.5) ; C212.1 4736.5,3086.5 v1(4765.94,3086.5) ; v1(4765.94,4638.5) 4805.82,4638.5 Reset.1 ; U0.7 4916.41,3343.03 4980.94,3278.5 5178.16,3278.5 v1(5186.15,3286.5)
  Bottom Layer w10: v1(4165.94,4213.5) 4165.94,4227.65 4279.92,4341.62 4279.92,4694.53 v1(4270.94,4703.5) ; v1(4485.94,3536.5) 5162.95,3536.5 5200.94,3498.5 5200.94,3301.29 v1(5186.15,3286.5) 5130.63,3230.98 5130.63,3133.94 5144.1,3120.47 5144.1,3101.42 5130.63,3087.96 5111.59,3087.96 5040.94,3158.6 5040.94,3181.02 4983.46,3238.5 4820.94,3238.5 4765.94,3183.5 v1(4765.94,3086.5) ; v1(4485.94,4633.5) 4490.94,4638.5 v1(4765.94,4638.5)
SDIO_CLK: CARD.5 U0.53 | length 1601.5
  Top Layer w10: CARD.5 3815.59,4708.14 v1(3840.95,4733.5) ; v1(4155.94,4398.5) 4200.94,4353.5 4280.94,4353.5 4410.94,4223.5 4410.94,3993.5 4652.05,3752.4 U0.53
  Bottom Layer w10: v1(3840.95,4733.5) 3840.95,4708.5 4045.95,4503.5 4045.95,4378.5 4060.95,4363.5 4120.94,4363.5 4128.87,4371.43 4129.67,4371.43 4143.14,4384.9 4143.14,4385.7 v1(4155.94,4398.5)
SDIO_CMD: CARD.3 R413.1 U0.54 | length 1635.1
  Top Layer w10: CARD.3 3828.97,4621.53 v1(3930.01,4722.57) 3949.12,4741.68 R413.1 ; v1(4120.15,4399.43) 4120.15,4399.3 4185.94,4333.5 4265.94,4333.5 4390.94,4208.5 4390.94,3988.5 4646.73,3732.71 U0.54
  Bottom Layer w10: v1(3930.01,4722.57) 3930.01,4654.44 4120.15,4464.3 v1(4120.15,4399.43)
SDIO_D0: CARD.7 R414.1 U0.39 | length 1892.5
  Top Layer w10: CARD.7 3892.2,4794.76 3950.95,4853.5 4097.2,4853.5 v1(4117.6,4833.1) R414.1 ; v1(4345.55,4421.38) 4348.07,4421.38 4670.94,4098.5 4930.94,4098.5 4975.48,4053.97 U0.39
  Bottom Layer w10: v1(4117.6,4833.1) 4142.2,4808.5 4198.46,4808.5 4300.94,4706.02 4300.94,4438.5 4320.94,4418.5 4342.68,4418.5 v1(4345.55,4421.38)
SDIO_D1: CARD.8 R415.1 U0.40 | length 1884.2
  Top Layer w10: CARD.8 3905.51,4838.06 3940.95,4873.5 4138.45,4873.5 v1(4178.99,4832.96) R415.1 ; v1(4325.36,4455.91) 4322.56,4453.11 4322.56,4411.86 4655.91,4078.5 4915.94,4078.5 4955.78,4038.66 U0.40
  Bottom Layer w10: v1(4178.99,4832.96) 4206.49,4832.96 4325.36,4714.08 v1(4325.36,4455.91)
SDIO_D2: CARD.1 R411.1 U0.51 | length 1639.3
  Top Layer w10: CARD.1 3807.36,4534.91 3940.95,4668.5 v1(3985.27,4668.5) 4025.27,4708.5 4055.27,4708.5 R411.1 ; v1(4225.94,4398.5) 4300.94,4398.5 4450.94,4248.5 4450.94,4013.5 4672.68,3791.77 U0.51
  Bottom Layer w10: v1(3985.27,4668.5) 4225.94,4427.82 v1(4225.94,4398.5)
SDIO_D3: CARD.2 R412.1 U0.52 | length 1624.7
  Top Layer w10: CARD.2 3815.66,4578.22 3930.95,4693.5 v1(3959.02,4693.5) 3979.02,4693.5 R412.1 ; v1(4190.94,4398.5) 4213.94,4375.51 4293.94,4375.51 4430.94,4238.5 4430.94,4003.5 4662.36,3772.08 U0.52
  Bottom Layer w10: v1(3959.02,4693.5) 3962.27,4690.25 3962.27,4658.98 4190.94,4430.31 v1(4190.94,4398.5)
SPI1_CS: LCD.5 U0.41 | length 1799.2
  Top Layer w10: LCD.5 3741.62,4072.83 3756.62,4057.83 v1(3930.95,4057.83) ; v1(4928.51,3985.51) 4936.1,3977.91 U0.41
  Bottom Layer w10: v1(3930.95,4057.83) 3975.95,4012.83 3975.95,3783.5 4120.94,3638.5 4609.02,3638.5 4931.5,3960.99 4931.5,3982.52 v1(4928.51,3985.51)
SPI1_DC: LCD.4 U0.42 | length 1728.9
  Top Layer w10: LCD.4 v1(3930.95,4092.52) ; v1(4900.04,3970.51) 4916.41,3954.13 U0.42
  Bottom Layer w10: v1(3930.95,4092.52) 3995.95,4027.52 3995.95,3793.5 4130.94,3658.5 4588.03,3658.5 v1(4900.04,3970.51)
SPI1_MISO: LCD.7 U0.22 | length 2135
  Top Layer w10: LCD.7 3720.99,4033.46 3765.99,3988.46 v1(3930.95,3988.46) ; U0.22 5327.31,3634.29 v1(5332.31,3629.29)
  Bottom Layer w10: v1(3930.95,3988.46) 3930.95,3768.5 4100.94,3598.5 5190.94,3598.5 5225.94,3633.5 5328.1,3633.5 v1(5332.31,3629.29)
SPI1_MOSI: LCD.6 U0.23 | length 2186.9
  Top Layer w10: LCD.6 3731.3,4053.15 3760.99,4023.46 v1(3930.95,4023.46) ; U0.23 5352.31,3653.97 v1(5357.31,3648.97)
  Bottom Layer w10: v1(3930.95,4023.46) 3955.95,3998.46 3955.95,3773.5 4110.94,3618.5 5180.94,3618.5 5211.41,3648.97 5319.48,3648.97 5322.79,3652.29 5341.84,3652.29 5345.15,3648.97 v1(5357.31,3648.97)
SPI1_RESET: LCD.2 U0.20 | length 2295.4
  Top Layer w10: LCD.2 3819.33,4131.89 3849.33,4161.89 v1(3930.95,4161.89) ; U0.20 5277.31,3594.92 v1(5282.31,3589.92)
  Bottom Layer w10: v1(3930.95,4161.89) 3875.95,4106.89 3875.95,3763.5 4079.96,3559.49 5209.41,3559.49 5239.85,3589.92 v1(5282.31,3589.92)
SPI1_SCK: LCD.3 U0.21 | length 2265.5
  Top Layer w10: LCD.3 3834.64,4112.2 3849.64,4127.2 v1(3930.95,4127.2) ; U0.21 5302.31,3614.6 v1(5307.31,3609.6)
  Bottom Layer w10: v1(3930.95,4127.2) 3895.95,4092.2 3895.95,3773.5 4090.95,3578.5 5200.94,3578.5 5235.36,3612.92 5304,3612.92 v1(5307.31,3609.6)
SPI2_MISO: U0.10 U9.12 | length 2640
  Top Layer w10: U9.12 4243.74,4535.7 4255.94,4523.5 4255.94,4453.5 4240.94,4438.5 4090.95,4438.5 4075.95,4423.5 4075.95,3788.5 4235.94,3628.5 4317.19,3628.5 4592.19,3353.5 4630.94,3353.5 4645.94,3368.5 4645.94,3393.5 v1(4620.94,3418.5) ; U0.10 4975.48,3363.97 4998.94,3340.51 5105.38,3340.51 v1(5112.16,3347.29)
  Bottom Layer w10: v1(4620.94,3418.5) 4650.94,3418.5 4690.94,3458.5 5090.94,3458.5 5135.94,3413.5 5135.94,3371.08 v1(5112.16,3347.29)
SPI2_MOSI: U0.11 U9.14 | length 2450.8
  Top Layer w10: U9.14 4208.77,4581.89 4235.59,4581.89 4248.84,4568.64 4248.84,4565.61 4275.94,4538.5 4275.94,4448.5 4249.86,4422.42 4109.86,4422.42 4095.95,4408.5 4095.95,4383.5 4165.94,4313.5 4250.94,4313.5 4370.94,4193.5 4370.94,3744.01 4565.94,3549.01 4565.94,3428.5 4610.94,3383.5 v1(4620.94,3383.5) ; U0.11 4995.15,3369.38 5006.03,3358.5 v1@5085.94,3358.5
  Bottom Layer w10: v1(4620.94,3383.5) 4645.94,3383.5 4700.94,3438.5 5080.94,3438.5 5115.94,3403.5 5115.94,3385.99 5093.46,3363.5 v1(5085.94,3363.5)
SPI2_SCK: U0.34 U9.16 | length 1268.8
  Top Layer w10: U9.16 4246.38,4638.07 4355.94,4528.5 4355.94,4443.5 4680.94,4118.5 4945.94,4118.5 5073.9,3990.55 U0.34
SWCLK: H3.3 U0.49 | length 1094.1
  Top Layer w10: U0.49 5103.59,3831.14 5160.24,3887.8 5724.49,3887.8 H3.3
SWIO: H3.2 U0.46 | length 1060.9
  Top Layer w10: U0.46 4837.68,3866.77 4855.94,3848.5 5095.94,3848.5 5157.31,3909.87 5646.57,3909.87 H3.2
TF_CD: CARD.CD U0.16 | length 2588.2
  Top Layer w10: CARD.CD 3794.18,4888.5 4185.94,4888.5 v1(4240.94,4833.5) ; v1(4415.94,3753.5) 4415.94,3733.5 4590.94,3558.5 4590.94,3473.5 4612.95,3451.5 v1(4620.94,3451.5) ; U0.16 5096.09,3454.63 v1(5128.44,3454.63)
  Bottom Layer w10: v1(4240.94,4833.5) 4415.94,4658.5 v1(4415.94,3753.5) ; v1(4620.94,3451.5) 4648.94,3451.5 4675.94,3478.5 5104.57,3478.5 v1(5128.44,3454.63)
TP_CS: U0.8 U8.5 U9.15 | length 3818
  Top Layer w10: v1(4130.94,4213.5) 4130.94,3763.5 4245.94,3648.5 4333.94,3648.5 v1(4450.94,3531.5) ; U9.15 4171.97,4612.48 4155.94,4628.5 4155.94,4653.5 v1(4170.94,4668.5) 4240.94,4668.5 4375.94,4533.5 4375.94,4453.5 4615.94,4213.5 4759.39,4213.5 4785.94,4240.06 4785.94,4293.5 4761.65,4317.8 U8.5 ; U0.8 4936.1,3348.34 4985.94,3298.5 5155.8,3298.5 v1(5163.74,3306.45)
  Bottom Layer w10: v1(4130.94,4213.5) 4130.94,4228.5 4260.94,4358.5 4260.94,4578.5 v1(4170.94,4668.5) ; v1(4450.94,3531.5) 4468.94,3513.5 5155.94,3513.5 5175.94,3493.5 5175.94,3318.65 v1(5163.74,3306.45)
TP_IRQ: R92.1 U0.9 U8.4 U9.11 | length 3565.4
  Top Layer w10: U9.11 4174.34,4510.11 4135.94,4548.5 4135.94,4666.02 4161.42,4691.5 4247.95,4691.5 4330.94,4608.5 4500.94,4608.5 4550.94,4658.5 4550.94,4763.5 4560.94,4773.5 4684.12,4773.5 R92.1 4660.33,4686.07 v1(4660.33,4409.66) 4660.33,4309.32 4671.15,4298.5 4698.5,4298.5 U8.4 ; v1(4465.94,3753.5) 4465.94,3713.5 4620.52,3558.93 v1(4620.52,3485.51) ; U0.9 4958.59,3454.33 4958.59,3355.86 4993.94,3320.51 5130.38,3320.51 v1(5137.16,3327.29)
  Bottom Layer w10: v1(4465.94,3753.5) 4465.94,4253.5 4622.1,4409.66 v1(4660.33,4409.66) ; v1(4620.52,3485.51) 4633.51,3498.5 5135.94,3498.5 5155.94,3478.5 5155.94,3346.08 v1(5137.16,3327.29)
USB_OTG_FS_DM: R571.2 U0.44 | length 2198.2
  Top Layer w10: R571.2 3577.02,4138.16 v1(3578.66,4139.8) ; v1(4826.49,4054.05) 4877.05,4003.5 U0.44
  Bottom Layer w10: v1(3578.66,4139.8) 3578.66,4125.79 3650.95,4053.5 3755.95,4053.5 3905.95,4203.5 3955.95,4203.5 3983.03,4176.42 3983.03,4106.42 4040.95,4048.5 4040.95,3813.5 4155.94,3698.5 4565.94,3698.5 4735.94,3868.5 4735.94,4028.5 4775.94,4068.5 4812.05,4068.5 v1(4826.49,4054.05)
USB_OTG_FS_DP: R572.2 U0.45 | length 2133.1
  Top Layer w10: R572.2 v1(3575.95,3963.84) ; v1(4790.94,4043.5) 4857.36,3977.08 U0.45
  Bottom Layer w10: v1(3575.95,3963.84) 3650.61,4038.5 3765.95,4038.5 3912.33,4184.88 3944.56,4184.88 3960.95,4168.5 3960.95,4093.5 4017.81,4036.64 4017.81,3801.64 4140.94,3678.5 4575.94,3678.5 4760.94,3863.5 4760.94,4013.5 v1(4790.94,4043.5)
USB_OTG_FS_ID: U0.43
VBAT: +Battery-.1 PowerSwitch.2 U7.5 | length 1281.3
  Top Layer w20: +Battery-.1 v1(3288.12,3159.29) 3526.73,3159.29 3755.95,3388.5 U7.5
  Bottom Layer w20: PowerSwitch.2 3130.95,3548.5 3130.95,3316.46 v1(3288.12,3159.29)
VBUS: @今晚早起吃午饭.A4 @今晚早起吃午饭.A9 @今晚早起吃午饭.B4 @今晚早起吃午饭.B9 D1.2 R79.2 R711.1 R712.2 | length 3453.3
  Top Layer w20: 3409.07,3957.71 3446.73,3957.71 v1(3475.95,3928.5) 3475.95,3876.89 D1.2 3310.95,3711.89 3310.95,3483.5 3330.95,3463.5 3510.95,3463.5 3560.95,3513.5 4101.77,3513.5 4206.77,3408.5 R79.2 ; 3409.07,4146.69 3412.77,4142.99 v1(3448.82,4142.99) ; R712.2 4517.31,4801 R711.1
  Bottom Layer w20: v1(3475.95,3928.5) 3448.82,3955.63 v1(3448.82,4142.99) 3468.82,4162.99 3468.82,4431.38 3900.95,4863.5 4400.94,4863.5 v1(4490.94,4773.5)
VCC3V3: C001.1 C011.1 C012.1 C013.2 C014.1 C015.1 C41.1 C102.2 C211.1 C911.2 C912.2 CARD.4 H3.1 LCD.9 LCD.10 LEDP.1 R92.2 R212.1 R411.2 R412.2 R413.2 R414.2 R415.2 R811.2 R812.2 U0.1 U0.13 U0.19 U0.32 U0.48 U0.64 U1.4 U2.1 U8.1 U9.1 U9.9 U9.10 | length 12853.9
  Top Layer w10: U9.1 4046.09,4638.07 ; R414.2 4046.09,4638.07 ; U9.9 U9.10 4169.93,4484.52 4046.09,4608.36 4046.09,4638.07 ; v1(4635.39,4239.06) U8.1 ; U0.64 4768.59,3535.86 4798.31,3506.14 U0.1 4798.31,3316.14 4910.99,3203.45 v1(4910.99,3178.5) ; v1(4790.94,3964.87) 4797.63,3958.19 4797.63,3909.2 U0.48 ; U0.13 5034.52,3414.56 v1(5055.76,3393.32) ; U0.19 5247.63,3575.23 v1(5257.65,3565.21) ; U0.32 5227.64,3831.14 v1(5230.94,3834.45)
  Top Layer w20: v1(3475.95,3498.5) 3449.02,3498.5 U1.4 3389.02,3722.01 3465.51,3798.5 3570.95,3798.5 3590.95,3818.5 3590.95,3923.94 3649.24,3982.24 3652.21,3982.24 ; LCD.10@3684.69,3976.61 3657.84,3976.61 3652.21,3982.24 ; LCD.9@3684.69,3991.89 3661.87,3991.89 3652.21,3982.24 ; LEDP.1 4005.95,3084.85 4005.95,3043.5 4027.64,3021.81 4321.81,3021.81 C911.2 C912.2 4455.94,3074.22 4475.94,3054.22 4575.32,3054.22 4595.32,3074.22 C211.1 C41.1 4664.7,3073.5 4689.7,3048.5 4780.94,3048.5 4805.94,3073.5 C015.1 C014.1 v1(4910.99,3085.95) C013.2 v1(4976.26,3085.95) 4976.59,3086.28 v1(5045.68,3086.28) 5096.44,3086.28 v1(5121.11,3110.95) 5121.11,3108.34 5145.94,3083.5 5163.47,3083.5 v1(5190.94,3110.98) 5215.98,3085.95 C102.2 ; v1(4282.2,4893.5) 4282.2,4811 R212.1 4270.27,4801 R415.2 R414.2 4090.38,4801 R411.2 R412.2 R413.2 3961.55,4801 3825.39,4664.84 CARD.4 3745.95,4664.84 3715.28,4634.17 3715.28,4504.17 3805.95,4413.5 3805.95,4308.5 3785.95,4288.5 3740.95,4288.5 3615.95,4163.5 3615.95,4018.5 3652.21,3982.24 ; R811.2 R812.2 R92.2 4748.44,4833.5 4875.94,4833.5 U2.1
  Bottom Layer w10: v1(4635.39,4239.06) 4635.39,4262.95 4940.94,4568.5 U2.1 ; v1(4790.94,3964.87) 4790.94,3969.36 4780.94,3979.36 4780.94,4000.99 4808.46,4028.5 5150.94,4028.5 5440.94,3738.5 5440.94,3218.5 5253.27,3030.83 5031.38,3030.83 v1(4976.26,3085.95) ; v1(4910.99,3085.95) v1(4910.99,3178.5) ; v1(5045.68,3086.28) 5045.68,3078.76 5064.96,3059.49 5226.93,3059.49 5399.32,3231.88 5399.32,3720.13 5272.95,3846.5 5242.99,3846.5 v1(5230.94,3834.45) ; v1(5055.76,3393.32) 5055.76,3243.68 5100.94,3198.5 5100.94,3131.11 v1(5121.11,3110.95) ; v1(5190.94,3110.98) 5190.94,3178.5 5257.65,3245.21 v1(5257.65,3565.21)
  Bottom Layer w20: v1(3475.95,3498.5) 3885.95,3088.5 v1(4005.95,3088.5) ; v1(4282.2,4893.5) 4425.94,4893.5 4490.94,4828.5 4880.94,4828.5 U2.1 5440.94,4768.5 5770.94,4438.5 H3.1
VOUT: C101.1 D1.1 D7.1 Q7.2 U1.3 | length 2216.2
  Top Layer w20: D1.1 D7.1 3617.01,3649.05 U1.3 3627.87,3644.05 3645.39,3644.05 3745.95,3543.5 4288.18,3543.5 4633.18,3198.5 4825.94,3198.5 v1(4830.94,3203.5) ; v1(4840.94,3048.5) 5258.51,3048.5 C101.1
  Bottom Layer w20: v1(4830.94,3203.5) 4840.94,3193.5 v1(4840.94,3048.5)
XL/X-: LCD.15 U9.4 | length 971.9
  Top Layer w10: LCD.15 3723.42,3875.98 3805.95,3958.5 3940.95,3958.5 3955.95,3973.5 3955.95,4393.5 3910.95,4438.5 3910.95,4538.5 3933.74,4561.29 U9.4
XR/X+: LCD.17 U9.2 | length 1246.8
  Top Layer w10: LCD.17 3649.05,3836.61 3635.95,3823.5 3635.95,3808.5 3650.95,3793.5 3730.95,3793.5 3835.95,3898.5 3970.95,3898.5 4045.95,3973.5 4045.95,4578.5 4011.97,4612.48 U9.2
YD/Y+: LCD.18 U9.3 | length 1053.6
  Top Layer w10: LCD.18 3724.37,3816.93 3825.95,3918.5 3960.95,3918.5 4025.95,3983.5 4025.95,4573.5 4012.55,4586.89 U9.3
YU/Y-: LCD.16 U9.5 | length 966.5
  Top Layer w10: LCD.16 3733.73,3856.29 3815.95,3938.5 3950.95,3938.5 3975.95,3963.5 3975.95,4398.5 3930.95,4443.5 3930.95,4523.5 3943.14,4535.7 U9.5
pads on no net: +Battery-.3 +Battery-.4 @今晚早起吃午饭.17 @今晚早起吃午饭.18 @今晚早起吃午饭.19 @今晚早起吃午饭.20 @今晚早起吃午饭.A8 @今晚早起吃午饭.B8 LCD.19 LCD.20 PowerSwitch.1 PowerSwitch.4 PowerSwitch.5 U1.2 U7.9 U8.7 U8.8 U9.13

## Polygon pours and split planes (outlines as drawn)
GND on Top Layer (solid, remove dead copper, pour order 2): 3105.95,4968.5 5830.35,4968.5 5830.35,3000 3105.95,3000
VCC3V3 on Top Layer (solid, remove dead copper, pour order 0): 3105.95,4968.5 5830.35,4968.5 5830.35,3000 3105.95,3000
VCC3V3 on Bottom Layer (solid, remove dead copper, pour order 4): 3105.95,4968.5 5830.35,4968.5 5830.35,3000 3105.95,3000

## Keep-outs
Board Outline Layer:
  region: 4227.99,4240.16 4267.36,4240.16 cw(c4267.36,4200.79) 4306.73,4200.79 4306.73,3767.72 cw(c4267.36,3767.72) 4267.36,3728.35 4227.99,3728.35 cw(c4227.99,3767.72) 4188.62,3767.72 4188.62,4200.79 cw(c4227.99,4200.79)
  region: 5243.74,4445.67 5283.11,4445.67 cw(c5283.11,4406.3) 5322.48,4406.3 5322.48,4170.08 cw(c5283.11,4170.08) 5283.11,4130.71 5243.74,4130.71 cw(c5243.74,4170.08) 5204.37,4170.08 5204.37,4406.3 cw(c5243.74,4406.3)
  lines w1: 4188.62,3767.72 ccw(c4227.99,3767.72) 4227.99,3728.35 4267.36,3728.35 ccw(c4267.36,3767.72) 4306.73,3767.72 4306.73,4200.79 ccw(c4267.36,4200.79) 4267.36,4240.16 4227.99,4240.16 ccw(c4227.99,4200.79) 4188.62,4200.79 4188.62,3767.72 ; 5204.37,4170.08 ccw(c5243.74,4170.08) 5243.74,4130.71 5283.11,4130.71 ccw(c5283.11,4170.08) 5322.48,4170.08 5322.48,4406.3 ccw(c5283.11,4406.3) 5283.11,4445.67 5243.74,4445.67 ccw(c5243.74,4406.3) 5204.37,4406.3 5204.37,4170.08
  lines w10: 3105.95,3000 5830.35,3000 5830.35,4968.5 3105.95,4968.5 3105.95,3000

## Silkscreen, mask and mechanical layers (free items; w line width, h text height)
Mechanical Layer:
  lines w1: 4188.62,3767.72 ccw(c4227.99,3767.72) 4227.99,3728.35 4267.36,3728.35 ccw(c4267.36,3767.72) 4306.73,3767.72 4306.73,4200.79 ccw(c4267.36,4200.79) 4267.36,4240.16 4227.99,4240.16 ccw(c4227.99,4200.79) 4188.62,4200.79 4188.62,3767.72 ; 5204.37,4170.08 ccw(c5243.74,4170.08) 5243.74,4130.71 5283.11,4130.71 ccw(c5283.11,4170.08) 5322.48,4170.08 5322.48,4406.3 ccw(c5283.11,4406.3) 5283.11,4445.67 5243.74,4445.67 ccw(c5243.74,4406.3) 5204.37,4406.3 5204.37,4170.08